# EAGLE board PCB (EAGLE 7.5.0)
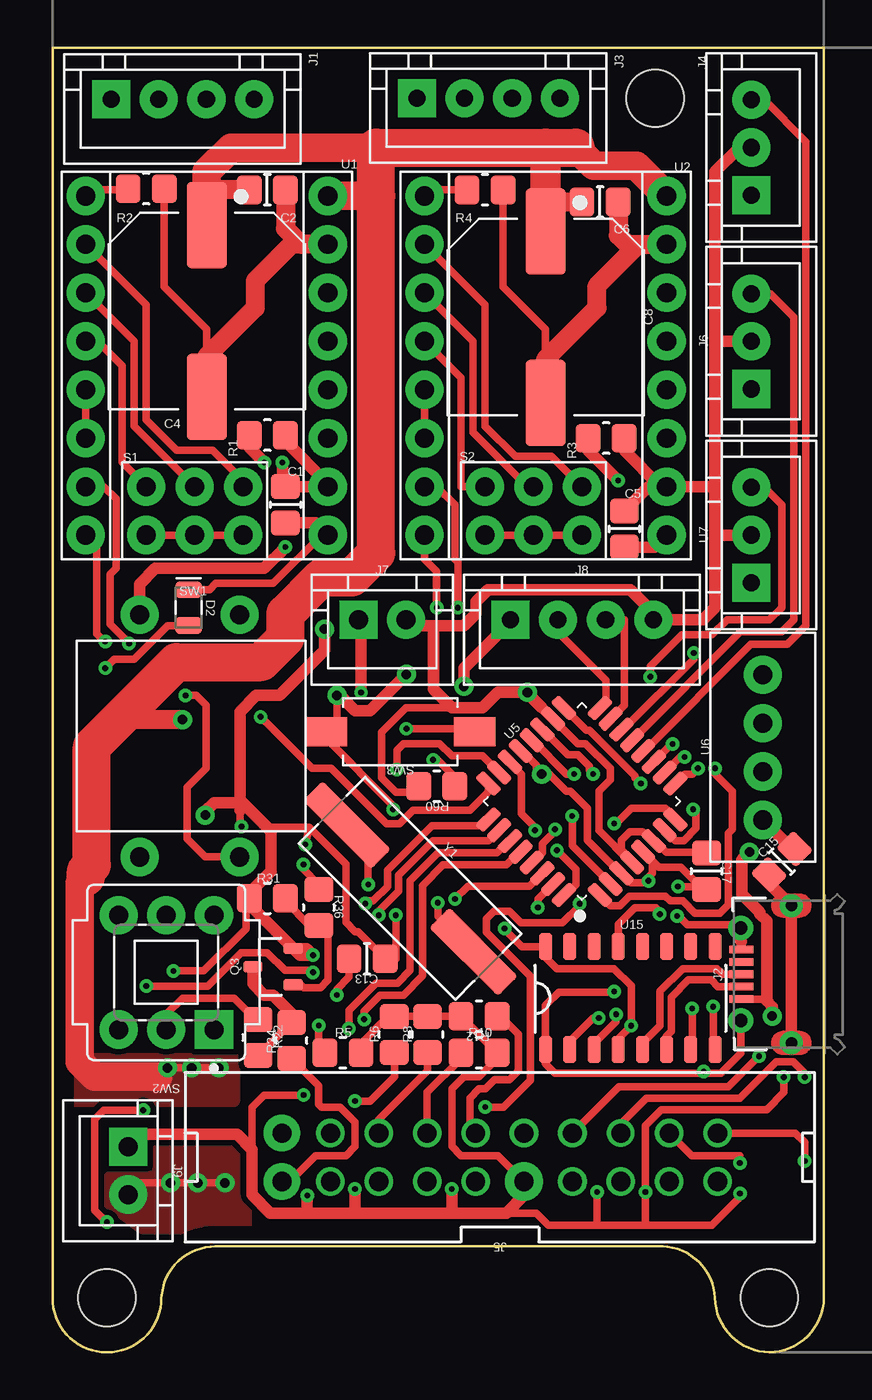
[diagram p0: board, top side]
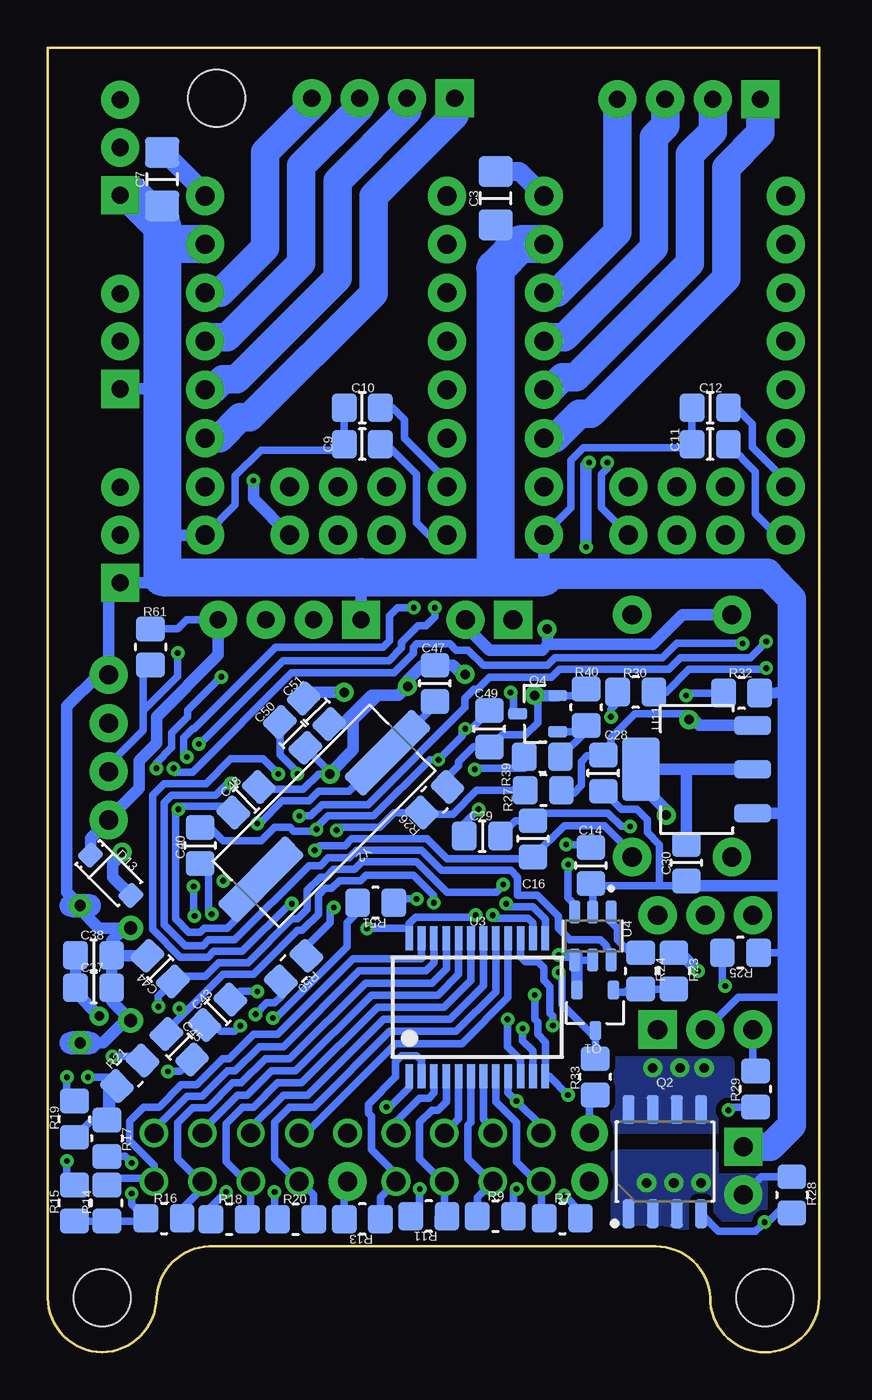
[diagram p1: board, bottom side, seen from below]

Size 40.48 x 68.42 mm. Coordinates in mm from the lower left corner, seen from the top.
Outline: 40.48,68.42 5.4,68.42 0,68.42 0,5.56 0,2.86 arc90 2.86,0 arc90 5.71,2.86 arc-87 8.57,5.56 31.75,5.56 arc-90 34.77,2.86 arc88 37.62,0 arc88 40.48,2.86 40.48,5.56 40.48,68.42
Copper layers (1*16): Top 0.035mm / dielectric 1.5mm / Bottom 0.035mm
Design rules "default *": minimum track width 10mil, minimum drill 0.61mm, track to track 8mil, track to pad 8mil, pad to pad 8mil, via to via 8mil, smd to smd 8mil, copper to edge 40mil, drill to drill 8mil, minimum pad ring 0mil, minimum via ring 8mil, stop-mask expansion 2mil, vias tented up to drill 20mil, thermal gap 10mil
Net classes: 0 Default: width 0.4 mm, clearance 0.3 mm
Holes 3 mm at 31.62,65.78 2.86,2.86 37.62,2.86

## Footprints (pad centres in the part's own frame; a part is rotated, then mirrored left to right if it is on the bottom)
Cap = smd 1.3 x 1.5: 1 -0.95,0; 2 0.95,0
Cap_C2 = smd 1.3 x 1.5: 1 -0.95,0; 2 0.95,0
CAP_1206 = smd 1.6 x 1.8: 1 -1.4,0; 2 1.4,0
CAPAE-10.3x10.3h13.5 = smd 4.5 x 2.1: 1 -4.5,0; 2 4.5,0
CAPAE-10.3x10.3h13.5_C8 = smd 4.5 x 2.1: 1 -4.5,0; 2 4.5,0
Cap_C9 = smd 1.3 x 1.5: 1 -0.95,0; 2 0.95,0
Cap_C10 = smd 1.3 x 1.5: 1 -0.95,0; 2 0.95,0
Cap_C13 = smd 1.3 x 1.5: 1 -0.95,0; 2 0.95,0
Cap_C16 = smd 1.3 x 1.5: 1 -0.95,0; 2 0.95,0
Cap_C28 = smd 1.3 x 1.5: 1 -0.95,0; 2 0.95,0
Cap_C29 = smd 1.3 x 1.5: 1 -0.95,0; 2 0.95,0
Cap_C50 = smd 1.3 x 1.5: 1 -0.95,0; 2 0.95,0
LED_0805(2012_Metric)_N_Red = smd 0.86 x 1.38: 1 -0.935,0; 2 0.935,0
Diode = smd 1 x 1.1: 1 -1.5,0; 2 1.5,0
B4B-XH-A = drill 0.9 pad 2 square: 1 -3.75,0 | drill 0.9 pad 2: 2 -1.25,0; 3 1.25,0; 4 3.75,0
JEEC_920-E52A2021S10100 = smd 0.4 x 1.25: 1 -1.3,2.225; 2 -0.65,2.225; 3 0,2.225; 4 0.65,2.225; 5 1.3,2.225 | drill 0.6 pad 1.2: 6@ -3.6,-0.4; 6@_2 3.6,-0.4 | drill 0.7 pad 1.3: 6@_1 -2.425,2.25; 6@_3 2.425,2.25
B3B-XH-A = drill 0.9 pad 2 square: 1 -2.5,0 | drill 0.9 pad 2: 2 0,0; 3 2.5,0
IDC20M = drill 1 pad 1.9: 1 11.43,1.27; 2 11.43,-1.27 | drill 1 pad 1.5: 3 8.89,1.27; 4 8.89,-1.27; 5 6.35,1.27; 6 6.35,-1.27; 7 3.81,1.27; 8 3.81,-1.27; 9 1.27,1.27; 10 1.27,-1.27; 12 -1.27,-1.27; 13 -3.81,1.27; 14 -3.81,-1.27; 15 -6.35,1.27; 17 -8.89,1.27; 18 -8.89,-1.27; 19 -11.43,1.27; 20 -11.43,-1.27 | drill 1 pad 2: 11 -1.27,1.27 | drill 1 pad 1.45: 16 -6.35,-1.27
B3B-XH-A_J6 = drill 0.9 pad 2 square: 1 -2.5,0 | drill 0.9 pad 2: 2 0,0; 3 2.5,0
B2B-XH-A = drill 1 pad 2 square: 1 -1.25,0 | drill 1 pad 2: 2 1.25,0
B4B-XH-A_J8 = drill 0.9 pad 2 square: 1 -3.75,0 | drill 0.9 pad 2: 2 -1.25,0; 3 1.25,0; 4 3.75,0
SOT23-3P95_230X110L30X43N = smd 0.61 x 1.01: 1 -0.95,-1.055; 2 0.95,-1.055; 3 0,1.055
SOIC8P127_488X585X363L48X40M = smd 0.64 x 1.52: 1 -1.905,-2.735; 2 -0.635,-2.735; 3 0.635,-2.735; 4 1.905,-2.735; 5 1.905,2.735; 6 0.635,2.735; 7 -0.635,2.735; 8 -1.905,2.735
SOT23-3P95_230X110L30X43N_Q3 = smd 0.61 x 1.01: 1 -0.95,-1.055; 2 0.95,-1.055; 3 0,1.055
SOT23-3P95_230X110L30X43N_Q4 = smd 0.61 x 1.01: 1 -0.95,-1.055; 2 0.95,-1.055; 3 0,1.055
Res = smd 1.3 x 1.5: 1 -0.95,0; 2 0.95,0
Res_R2 = smd 1.3 x 1.5: 1 -0.95,0; 2 0.95,0
Res_R5 = smd 1.3 x 1.5: 1 -0.95,0; 2 0.95,0
Res_R7 = smd 1.3 x 1.5: 1 -0.95,0; 2 0.95,0
Res_R26 = smd 1.3 x 1.5: 1 -0.95,0; 2 0.95,0
Res_R27 = smd 1.3 x 1.5: 1 -0.95,0; 2 0.95,0
Res_R30 = smd 1.3 x 1.5: 1 -0.95,0; 2 0.95,0
Res_R39 = smd 1.3 x 1.5: 1 -0.95,0; 2 0.95,0
Res_R61 = smd 1.3 x 1.5: 1 -0.95,0; 2 0.95,0
Untitled = drill 1 pad 2: 1 -1.27,2.54; 2 -1.27,0; 3 -1.27,-2.54; 4 1.27,2.54; 5 1.27,0; 6 1.27,-2.54
button = drill 1 pad 2: 1 -2.699,6.35; 2 -2.699,-6.35; 3 2.54,6.35; 4 2.54,-6.35
CK_PVA2-H1 = drill 1 pad 2 square: 1 -2.5,3 | drill 1 pad 2: 2 0,3; 3 2.5,3; 4 -2.5,-3; 5 0,-3; 6 2.5,-3
RES_btn = smd 2.2 x 1.5: 1 -3.9,0; 2 3.9,0
Untitled_U1 = drill 1 pad 2: 1 -6.35,8.89; 2 -6.35,6.35; 3 -6.35,3.81; 4 -6.35,1.27; 5 -6.35,-1.27; 6 -6.35,-3.81; 7 -6.35,-6.35; 8 -6.35,-8.89; 9 6.35,-8.89; 10 6.35,-6.35; 11 6.35,-3.81; 12 6.35,-1.27; 13 6.35,1.27; 14 6.35,3.81; 15 6.35,6.35; 16 6.35,8.89
SSOP24 = smd 0.4 x 1.25: 1 -3.575,-3.625; 2 -2.925,-3.625; 3 -2.275,-3.625; 4 -1.625,-3.625; 5 -0.975,-3.625; 6 -0.325,-3.625; 7 0.325,-3.625; 8 0.975,-3.625; 9 1.625,-3.625; 10 2.275,-3.625; 11 2.925,-3.625; 12 3.575,-3.625; 13 3.575,3.625; 14 2.925,3.625; 15 2.275,3.625; 16 1.625,3.625; 17 0.975,3.625; 18 0.325,3.625; 19 -0.325,3.625; 20 -0.975,3.625; 21 -1.625,3.625; 22 -2.275,3.625; 23 -2.925,3.625; 24 -3.575,3.625
SOT95P280X145-6N = smd 1.21 x 0.58: 1 -1.255,0.95; 2 -1.255,0; 3 -1.255,-0.95; 4 1.255,-0.95; 5 1.255,0; 6 1.255,0.95
QFP32P80_900X900X120L60X37L_AD2 = smd 0.55 x 1.4: 1 -2.8,-4.135; 2 -2,-4.135; 3 -1.2,-4.135; 4 -0.4,-4.135; 5 0.4,-4.135; 6 1.2,-4.135; 7 2,-4.135; 8 2.8,-4.135; 17 2.8,4.135; 18 2,4.135; 19 1.2,4.135; 20 0.4,4.135; 21 -0.4,4.135; 22 -1.2,4.135; 23 -2,4.135; 24 -2.8,4.135 | smd 1.4 x 0.55: 9 4.135,-2.8; 10 4.135,-2; 11 4.135,-1.2; 12 4.135,-0.4; 13 4.135,0.4; 14 4.135,1.2; 15 4.135,2; 16 4.135,2.8; 25 -4.135,2.8; 26 -4.135,2; 27 -4.135,1.2; 28 -4.135,0.4; 29 -4.135,-0.4; 30 -4.135,-1.2; 31 -4.135,-2; 32 -4.135,-2.8
DHT22 = drill 1 pad 2: 1 -3.81,0; 2 -1.27,0; 3 1.27,0; 4 3.81,0
SOT223-4P230_700X180L100X70N_AD1 = smd 0.99 x 1.97: 1 -2.3,-2.93; 2 0,-2.93; 3 2.3,-2.93 | smd 3.34 x 1.97: 4 0,2.93
SOIC16P127_1000X600X180L50X45N = smd 0.68 x 1.41: 1 -4.445,-2.7; 2 -3.175,-2.7; 3 -1.905,-2.7; 4 -0.635,-2.7; 5 0.635,-2.7; 6 1.905,-2.7; 7 3.175,-2.7; 8 4.445,-2.7; 9 4.445,2.7; 10 3.175,2.7; 11 1.905,2.7; 12 0.635,2.7; 13 -0.635,2.7; 14 -1.905,2.7; 15 -3.175,2.7; 16 -4.445,2.7
XTAL1140X490X430D1340L450X60N = smd 5.11 x 1.51: 1 -4.7,0; 2 4.7,0
XTAL1140X490X430D1340L450X60N_Y2 = smd 5.11 x 1.51: 1 -4.7,0; 2 4.7,0

## Placement (x,y rotation side)
C1  100nF  [Cap]  12.22,44.45 270 top
C2  100nF  [Cap_C2]  11.27,60.96 180 top
C3  10uF  [CAP_1206]  16.97,60.53 90 bottom
C4  1000uF  [CAPAE-10.3x10.3h13.5]  8.1,54.61 270 top
C5  100nF  [Cap]  30,43.18 270 top
C6  100nF  [Cap_C2]  28.73,60.33 180 top
C7  10uF  [CAP_1206]  34.47,61.53 90 bottom
C8  1000uF  [CAPAE-10.3x10.3h13.5_C8]  25.88,54.29 270 top
C9  10nF  [Cap_C9]  23.97,47.63 180 bottom
C10  10nF  [Cap_C10]  23.97,49.53 180 bottom
C11  10nF  [Cap_C9]  5.71,47.63 180 bottom
C12  10nF  [Cap_C10]  5.71,49.53 180 bottom
C13  100nF  [Cap_C13]  16.51,20.64 180 top
C14  100nF  [Cap_C9]  11.97,25.53 90 bottom
C15  100nF  [Cap_C13]  38.27,25.73 45 top
C16  10nF  [Cap_C16]  15.02,26.93 270 bottom
C17  100nF  [Cap_C13]  34.32,25.23 270 top
C28  10uF  [Cap_C28]  11.32,30.38 90 bottom
C29  10uF  [Cap_C29]  17.67,27.08 0 bottom
C30  10uF  [Cap_C10]  6.97,25.68 270 bottom
C37  100nF  [Cap_C29]  38.07,19.13 360 bottom
C38  1uF  [Cap_C29]  38.07,20.83 360 bottom
C40  100nF  [Cap_C29]  32.47,26.58 90 bottom
C43  100nF  [Cap_C29]  31.57,17.83 45 bottom
C44  22pF  [Cap_C29]  34.57,20.13 135 bottom
C45  22pF  [Cap_C29]  33.57,16.03 315 bottom
C47  22pF  [Cap_C9]  20.16,35.08 90 bottom
C48  22pF  [Cap_C29]  30.07,28.98 45 bottom
C49  10nF  [Cap_C9]  17.3,32.7 90 bottom
C50  100nF  [Cap_C50]  27.62,32.38 315 bottom
C51  100nF  [Cap_C50]  26.37,33.63 315 bottom
D2  Yellow  [LED_0805(2012_Metric)_N_Red]  7.14,39.05 270 top
D13  DIO  [Diode]  37.17,25.03 315 bottom
J1  STEP_MOT  [B4B-XH-A]  6.83,65.72 0 top
J2  USB  [JEEC_920-E52A2021S10100]  38.37,19.83 90 top
J3  STEP_MOT  [B4B-XH-A]  22.87,65.78 0 top
J4  ENDSTOP  [B3B-XH-A]  36.67,63.18 90 top
J5  SENSOR  [IDC20M]  23.47,10.23 180 top
J6  ENDSTOP  [B3B-XH-A_J6]  36.67,53.02 90 top
J7  LASER  [B2B-XH-A]  17.3,38.42 0 top
J8  ULTRASONIC  [B4B-XH-A_J8]  27.78,38.42 0 top
J9  POWER  [B2B-XH-A]  3.97,9.53 270 top
Q1  P MOSPFET  [SOT23-3P95_230X110L30X43N]  11.75,17.94 180 bottom
Q2  IRF4905LPBF  [SOIC8P127_488X585X363L48X40M]  8.1,10 0 bottom
Q3  P MOSPFET  [SOT23-3P95_230X110L30X43N_Q3]  11.57,20.23 90 top
Q4  N MOSPFET  [SOT23-3P95_230X110L30X43N_Q4]  14.76,33.5 90 bottom
R1  1K  [Res]  11.27,48.1 180 top
R2  10K  [Res_R2]  4.92,61.03 180 top
R3  1K  [Res]  29.05,47.94 180 top
R4  10K  [Res_R2]  22.7,60.96 180 top
R5  10K  [Res_R5]  15.24,15.72 0 top
R6  10K  [Res_R5]  17.94,16.67 90 top
R7  10K  [Res_R7]  13.47,7.03 0 bottom
R8  10K  [Res_R5]  19.68,16.67 90 top
R9  10K  [Res_R7]  16.99,7.14 0 bottom
R10  10K  [Res_R5]  22.38,15.72 0 top
R11  10K  [Res_R7]  20.48,7.14 180 bottom
R12  10K  [Res_R5]  22.38,17.62 180 top
R13  10K  [Res_R7]  23.97,6.99 180 bottom
R14  10K  [Res_R7]  37.37,7.83 90 bottom
R15  10K  [Res_R7]  39.07,7.83 90 bottom
R16  10K  [Res_R7]  34.37,7.03 0 bottom
R17  10K  [Res_R7]  37.37,11.23 270 bottom
R18  10K  [Res_R7]  30.96,6.99 360 bottom
R19  10K  [Res_R7]  39.07,12.23 90 bottom
R20  10K  [Res_R7]  27.46,6.99 0 bottom
R21  10K  [Res_R7]  36.17,14.63 45 bottom
R22  10K  [Res_R5]  10.79,16.51 270 top
R23  10K  [Res_R7]  7.62,20 270 bottom
R24  100R  [Res_R7]  9.37,20 270 bottom
R25  10K  [Res_R7]  4.13,20.96 180 bottom
R26  10K  [Res_R26]  20.17,28.98 225 bottom
R27  8K  [Res_R27]  14.47,29.48 180 bottom
R28  10K  [Res_R7]  1.43,8.26 270 bottom
R29  100R  [Res_R7]  3.33,13.81 90 bottom
R30  100R  [Res_R30]  9.62,34.63 180 bottom
R31  10K  [Res_R5]  11.27,23.81 0 top
R32  10K  [Res_R30]  4.07,34.58 180 bottom
R33  100R  [Res_R7]  11.75,14.45 90 bottom
R34  100R  [Res_R5]  12.54,16.35 90 top
R36  100R  [Res_R5]  13.97,23.33 270 top
R39  100R  [Res_R39]  14.52,31.23 0 bottom
R40  10K  [Res_R26]  12.22,33.83 90 bottom
R50  1K  [Res_R7]  27.57,20.13 225 bottom
R51  1K  [Res_R7]  23.27,23.58 180 bottom
R60  10K  [Res_R5]  20.16,29.69 180 top
R61  47K  [Res_R61]  35.08,36.99 270 bottom
S1  3XSWITCH  [Untitled]  7.46,44.13 90 top
S2  3XSWITCH  [Untitled]  25.24,44.13 90 top
SW1  ON BUTTN  [button]  7.27,32.33 0 top
SW2  POWER SWITCH  [CK_PVA2-H1]  5.97,19.93 180 top
SW3  RES BTN  [RES_btn]  18.26,32.54 180 top
U1  DRIVER  [Untitled_U1]  8.1,51.75 0 top
U2  DRIVER  [Untitled_U1]  25.88,51.75 0 top
U3  1:16 MLTIPLECSOR  [SSOP24]  17.94,18.1 0 bottom
U4  1:2 MULTIPLECSOR  [SOT95P280X145-6N]  11.87,21.83 270 bottom
U5  ATMEGA328P  [QFP32P80_900X900X120L60X37L_AD2]  27.78,28.89 45 top
U6  DHT  [DHT22]  37.27,31.73 90 top
U7  SERVO  [B3B-XH-A_J6]  36.67,42.86 90 top
U11  AMS1117-3.3  [SOT223-4P230_700X180L100X70N_AD1]  6.42,30.58 90 bottom
U15  CH340G  [SOIC16P127_1000X600X180L50X45N]  30.32,18.57 0 top
Y1  12MHz  [XTAL1140X490X430D1340L450X60N]  18.77,24.33 315 top
Y2  16MHz  [XTAL1140X490X430D1340L450X60N_Y2]  25.97,28.13 225 bottom

## Library data of the parts
C1-C3 C5-C7 C9-C17 C28-C30 C37 C38 C40 C43-C45 C47-C51 = common; DESCRIPTION: Capacitor
C4 C8 = common; DESCRIPTION_1: Capacitor; DESCRIPTION_2: Polarized
D2 = common; MANUFACTURER: https://www.chipdip.ru/product/kp-2012ec; UNIQUE_NAME: LED100
D13 = common; DESCRIPTION: Diode
J1-J9 Q1 Q3 Q4 S1 S2 U1-U7 U15 = common
Q2 = common; MANUFACTURER: https://www.chipdip.ru/product/irf9310trpbf-infineon; PART_NUMBER_(DIGI-KEY): IRF4905LPBF-ND; PART_NUMBER_(LCSC): C537768; UNIQUE_NAME: IR_TO-220AB
R1-R34 R36 R39 R40 R50 R51 R60 R61 = common; DESCRIPTION: Resistor
SW1 SW3 = common; DESCRIPTION: Make Contact; MANUFACTURER: https://www.chipdip.ru/product0/8007094223
SW2 = common; DESCRIPTION: Toggle Switch SPDT Through Hole; MANUFACTURER: https://www.chipdip.ru/product0/8003917651
U11 = common; DATASHEET: http://datasheets.diptrace.com/jsmsemi/AMS1117-3.3.pdf; MANUFACTURER: JSMSEMI; PART_NUMBER_(LCSC): C917183; UNIQUE_NAME: JSMSEMI_SOT-223-3L
Y1 Y2 = common; DATASHEET: http://datasheets.diptrace.com/crystals/hc49-4hsmx.pdf; MANUFACTURER: IQD; UNIQUE_NAME: IQD_HC49_4H

## Nets
Gnd: C1.2 C2.1 C3.1 C4.2 C5.2 C6.1 C7.1 C8.2 C9.2 C10.2 C11.2 C12.2 C13.2 C14.1 C15.1 C17.2 C28.1 C29.1 C30.2 C37.2 C38.2 C43.2 C44.2 C45.2 C47.2 C48.2 C49.1 C50.2 C51.2 D2.1 J2.5 J2.6@ J2.6@_1 J2.6@_2 J2.6@_3 J4.1 J5.11 J6.1 J8.1 J9.1 Q4.2 R2.1 R4.1 R5.2 R6.2 R7.2 R8.2 R9.2 R10.2 R11.2 R12.2 R13.2 R14.1 R15.1 R16.1 R17.1 R18.1 R19.1 R20.1 R21.1 R22.1 R25.1 R26.1 R32.1 R40.2 SW2.2 SW3.2 U1.9 U1.15 U2.9 U2.15 U3.12 U4.2 U5.3 U5.5 U5.21 U6.4 U7.1 U11.1 U15.1
Net_0: Q4.1 R39.2 R40.1
Net_1: R24.1 U4.1
Net_2: C2.2 C3.2 C4.1 C6.2 C7.2 C8.1 C28.2 Q2.5 Q2.6 Q2.7 Q2.8 R27.1 U1.16 U2.16 U11.3
Net_3: U1.5 U1.6
Net_4: U2.5 U2.6
Net_5: J3.4 U2.14
Net_6: J3.3 U2.13
Net_7: J3.2 U2.12
Net_8: J3.1 U2.11
Net_9: J5.10 R12.1 U3.3
Net_10: J5.2 R33.1
Net_11: Q3.3 R22.2 R34.2
Net_12: R3.2 S2.1 S2.2 S2.3
Net_13: R4.2 U2.1
Net_14: Q3.1 R31.2 R36.2
Net_15: R36.1 U4.3
Net_16: J8.2 U5.16
Net_17: Q1.1 R23.2 R24.2
Net_18: R26.2 R27.2 U5.22
Net_19: J1.4 U1.14
Net_20: J1.3 U1.13
Net_21: J1.2 U1.12
Net_22: J1.1 U1.11
Net_23: S1.6 U1.2
Net_24: S1.5 U1.3
Net_25: S1.4 U1.4
Net_26: R1.2 S1.1 S1.2 S1.3
Net_27: R2.2 U1.1
Net_28: C12.1 U1.7 U5.9
Net_29: C11.1 U1.8 U5.2
Net_30: C10.1 U2.7 U5.10
Net_31: J9.2 Q2.1 Q2.2 Q2.3 R28.1
Net_32: R29.2 SW2.3
Net_33: Q2.4 R28.2 R29.1
Net_36: S2.4 U2.4
Net_37: S2.5 U2.3
Net_38: S2.6 U2.2
Net_41: C9.1 U2.8 U5.11
Net_42: J4.3 U5.12
Net_43: J6.3 U5.13
Net_44: U3.1 U5.19
Net_45: U3.10 U5.28
Net_46: U3.11 U5.27
Net_47: U3.14 U5.26
Net_48: U3.13 U5.25
Net_49: R5.1 U3.15
Net_50: J5.1 R34.1
Net_51: J5.9 R13.1 U3.2
Net_52: Q1.3 R25.2 R33.2
Net_53: J5.7 R11.1 U3.4
Net_54: J5.8 R10.1 U3.5
Net_55: J5.5 R9.1 U3.6
Net_56: J5.6 R8.1 U3.7
Net_57: J5.3 R7.1 U3.8
Net_58: J5.4 R6.1 U3.9
Net_59: J5.19 R14.2 U3.23
Net_60: J5.20 R15.2 U3.22
Net_61: J5.17 R16.2 U3.21
Net_62: J5.18 R17.2 U3.20
Net_63: J5.15 R18.2 U3.19
Net_64: J5.16 R19.2 U3.18
Net_65: J5.13 R20.2 U3.17
Net_66: J5.14 R21.2 U3.16
Net_67: U4.6 U5.17
Net_68: J7.1 Q4.3
Net_69: R50.1 U5.31
Net_70: R39.1 U5.23
Net_72: R51.2 U15.2
Net_73: R50.2 U15.3
Net_74: C40.1 U15.13
Net_75: J8.3 U5.15
Net_76: J2.3 U15.5
Net_77: J2.2 U15.6
Net_78: C37.1 C38.1 D13.2 J2.1
Net_82: R30.2 U5.24
Net_83: D2.2 R30.1
Net_85: C16.2 R32.2 SW1.4 U5.32
Net_86: U5.1 U7.3
Net_87: C40.2 C49.2 R60.1 SW3.1 U5.29
Net_97: C48.1 U5.7 Y2.2
Net_100: C50.1 U5.20
Net_105: R51.1 U5.30
Net_110: C44.1 U15.8 Y1.1
Net_111: C45.1 U15.7 Y1.2
Net_125: R61.2 U5.14 U6.2
Net_155: C47.1 U5.8 Y2.1
USBVCC: C1.1 C5.1 C13.1 C14.2 C15.2 C16.1 C17.1 C29.2 C30.1 C43.1 C51.1 D13.1 J4.2 J6.2 J7.2 J8.4 Q1.2 Q3.2 R1.1 R3.1 R23.1 R31.1 R60.2 R61.1 SW1.1 U1.10 U2.10 U3.24 U4.4 U4.5 U5.4 U5.6 U5.18 U6.1 U7.2 U11.2 U11.4 U15.4 U15.16

## Tracks (layer width: path | path; a pad name or v marks a point on that pad's centre or on a via)
Gnd  (via drill 0.3 pad 0.7, 0.5 pad 1)
  Top 0.4: R2.1 5.87,55.88 8.1,53.66 C4.2 | R4.1 23.65,55.88 25.88,53.66 C8.2 | U5.21 | SW2.2 5.97,17.72 6.83,18.57 9.53,18.57 10.64,17.46 R22.1 | v36.07,8.33 36.17,8.23 34.61,6.67 31.11,6.67 | 31.11,6.67 28.58,6.67 | 28.58,6.67 26.04,6.67 25.4,7.3 23.81,7.3 | 31.11,6.67 v31.11,8.41 31.11,11.88 31.96,12.73 37.47,12.73 38.37,13.63 v38.37,14.43 | v28.58,8.41 28.58,6.67 | J5.11 23.38,10.32 21.43,10.32 20.96,10.8 20.96,13.81 21.59,14.45 22.38,14.45 23.33,15.4 R10.2 R12.2 R8.2 | R5.2 16.19,16.19 17.62,17.62 R6.2 R8.2 | v14.92,18.73 14.92,19.05 15.56,19.69 C13.2 | D2.1 8.24,39.99 8.57,40.32 11.59,40.32 14.13,42.86 U1.9 | v14.92,34.45 14.92,33.11 SW3.2 14.36,32.19 17.87,28.68 v17.87,28.48 | U5.21 24.66,31.53 25.4,30.8 25.4,30.6 v25.67,30.33 26.07,30.33 26.97,29.43 27.17,29.43 28.07,28.53 28.07,26.86 29.81,25.12 U5.3 30.35,24.63 30.97,24.63 31.27,24.93 | v29.47,18.93 29.44,18.89 26.57,18.89 25.88,18.2 U15.1 25.88,15.12 26.37,14.63 34.17,14.63 | R8.2 | 31.27,24.93 31.47,25.13 31.47,25.77 U5.5 | U5.5 | U5.5 31.81,25.43 32.97,25.43 34.12,24.28 C17.2 34.17,24.43 v32.82,24.43 | 34.17,14.63 35.07,14.63 36.12,15.68 J2.6@_1 | v34.17,14.73 34.17,14.63 | 36.15,21.53 J2.5 | v31.27,24.73 31.27,24.93 | v32.77,22.88 32.87,22.88 33.32,22.43 35.95,22.43 J2.6@_3 | 10.48,10.64 10.48,12.86 11.11,13.49 v13.18,13.49 | J9.1
  Top 0.55: U5.21
  Top 0.6: C5.2 31.59,42.23 U2.9 | C1.2 13.81,43.5 U1.9 | J8.1 24.03,38.32 21.59,35.88 v21.59,34.92 | J5.11 24.74,8.23 23.81,7.3 20.96,7.3 | 20.96,7.3 v20.96,8.57 | 20.96,7.3 15.87,7.3 | 15.87,7.3 v15.87,8.57 | 15.87,7.3 13.37,7.3 | 13.37,7.3 v13.37,8.23 | J9.1 | 13.37,7.3 11.43,7.3 10.48,8.26 10.48,10.64 9.68,11.43 3.97,11.43 J9.1 | v14.92,34.45 15.08,34.45 15.87,33.66 16.67,33.66 v18.57,35.56 | J2.6@_3 36.12,21.56 36.15,21.53 | J2.6@_2 | J2.6@_2 J2.6@ | J2.6@ | C15.1 37.6,24.6 J2.6@_2
  Top 1: U1.15 13.05,58.1 | 13.05,58.1 12.54,58.1 10.64,56.2 10.64,54.77 8.1,52.23 C4.2 | C8.2 25.88,52.07 28.58,54.77 28.58,55.93 30.75,58.1 U2.15 30.16,58.1 29.68,58.58 C6.1 | C2.1 12.22,58.94 13.05,58.1
  Bottom 0.4: C10.2 C9.2 24.92,47.31 29.29,47.31 30.64,45.96 30.64,44.45 U2.9 | C12.2 C11.2 6.66,47.43 12.37,47.43 13.02,46.78 13.02,44.29 U1.9 | C48.2 29.28,29.53 27.07,29.53 26.27,30.33 v25.67,30.33 25.72,30.33 25.72,30.48 C50.2 | SW2.2 5.93,16.93 4.25,18.61 1.43,18.61 | R25.1 1.43,20.96 | 1.43,24.48 11.87,24.48 U4.2 11.87,24.25 11.97,24.35 C14.1 | v13.18,13.49 14.15,14.47 U3.12 14.36,16.27 14.76,16.67 14.76,17.3 14.92,17.46 v14.92,18.73 | R7.2 12.52,7.38 v13.37,8.23 | R9.2 16.04,8.41 v15.87,8.57 | v20.96,8.57 20.96,7.62 R11.2 | R13.2 24.92,8.78 J5.11 | v28.58,8.41 28.58,7.15 R20.1 | R18.1 31.91,7.62 v31.11,8.41 | R15.1 R14.1 | R14.1 | v36.07,8.33 36.07,7.78 R16.1 35.47,6.88 R14.1 | R17.1 38.17,12.18 R19.1 | v38.37,14.43 37.12,14.43 37.12,12.43 R17.1 | R17.1 37.37,14.22 37.14,14.45 | R21.1 37.31,13.96 37.31,12.24 R17.1 | R40.2 12.37,34.78 12.7,34.45 Q4.2 14.76,34.45 | 14.76,34.45 14.76,33.02 15.4,32.39 16.61,32.39 17.25,31.75 C49.1 18.15,31.75 18.92,30.98 18.92,30.77 19.5,30.2 R26.1 | v14.92,34.45 14.76,34.45 | v29.47,18.93 30.37,18.93 30.8,18.5 C43.2 | v34.17,14.73 33.53,14.73 C45.2 | v32.82,24.43 32.82,22.93 v32.77,22.88 | C28.1 | C28.1 10.37,28.48 9.57,28.48 9.02,27.93 9.02,27.28 8.37,26.63 8.37,24.48 6.97,24.48 C30.2 | C29.1 18.62,27.73 v17.87,28.48
  Bottom 0.6: 34.45,40.66 34.75,40.36 U7.1 37.27,39.76 U6.4 37.8,35.54 39.47,33.87 39.47,24.13 J2.6@_2 38.77,23.23 37.8,22.25 J2.6@_3 36.45,22.25 37.12,21.58 C38.2 | J6.1 34.68,50.52 34.45,50.3 | U2.9 34.24,42.86 34.45,43.07 | J8.1 24.03,40.66 | v21.59,34.92 | v21.59,34.92 22.07,34.45 | 22.07,34.45 23.17,34.45 24.45,33.18 24.45,31.59 25.67,30.37 v25.67,30.33 | v21.59,34.92 21.59,35.24 20.8,36.03 C47.2 19.21,36.03 18.73,35.56 v18.57,35.56 | R32.1 1.43,34.63 | v21.59,34.92 22.07,34.45 | 22.07,34.45 23.5,34.45 24.99,32.96 C51.2 | U1.9 14.45,40.83 | Q4.2 v14.92,34.45 | J2.6@ 37.57,16.23 36.4,17.4 J2.6@_1 37.12,18.4 C37.2 C38.2 | C44.2 37.09,20.8 C38.2 | U11.1 1.43,28.28 | C30.2 6.97,24.48 1.43,24.48
  Bottom 1: C7.1 34.47,58.1 U2.15 | C3.1 15.95,58.1 U1.15
  Bottom 1.5: 36.08,60.68 J4.1 | 33.97,58.1 34.45,57.62 | 2.73,40.83 1.43,39.53 1.43,34.63 1.43,28.28 1.43,24.48 1.43,20.96 1.43,18.61 1.43,11.91 2.56,10.78 J9.1
  Bottom 1.6: 14.45,40.66 14.45,40.83 2.73,40.83
  Bottom 2: 36.08,60.68 34.45,59.06 34.45,57.62 34.45,50.3 34.45,43.07 34.45,40.66 24.03,40.66 16.99,40.66 | U2.15 33.97,58.1 | 16.99,40.66 14.45,40.66 | U1.15 15.72,58.1 16.99,56.83 16.99,40.66
Net_0
  Bottom 0.4: R39.2 12.22,32.58 R40.1 12.55,32.55 Q4.1
Net_1
  Bottom 0.4: R24.1 9.9,20.95 10.57,21.63 10.57,22.23 10.92,22.58 U4.1
Net_2  (via drill 0.5 pad 1)
  Top 0.4: v6.03,14.92 v7.3,14.92 v8.73,14.92
  Top 1: C6.2 25.88,60.33 C8.1 | C2.2 8.1,60.96 C4.1 | v6.03,14.92 5.56,14.45 | v6.82,33.18 3.48,33.18
  Top 1.5: U1.16 16.99,60.64 | 16.99,63.18 9.37,63.18 8.1,61.91 C4.1 | 5.56,14.45 2.22,14.45 1.43,15.24 1.43,24.61 1.75,24.92 | 27.46,63.18 28.42,62.23 30.64,62.23 U2.16
  Top 1.6: 25.88,62.87 C8.1
  Top 2: 25.88,63.18 16.99,63.18 16.99,60.64 16.99,41.91 15.72,40.64 14.13,40.64 12.22,38.74 12.22,37.47 10.95,36.2 6.5,36.2 3.48,33.18 2.06,31.76 2.06,25.56 1.75,25.24 1.75,24.92 | 25.88,63.18 25.88,62.87 | 25.88,63.18 27.46,63.18
  Bottom 0.4: v6.82,33.18 6.82,33.48 9.67,33.48 10.92,32.23 10.92,31.73 11.37,31.28 12.17,31.28 | 12.17,31.28 12.47,30.98 12.47,29.73 12.87,29.33 13.47,29.33 13.47,29.48 R27.1 | C28.2 11.77,31.33 12.17,31.28
  Bottom 0.6: U11.3 6.27,32.88 6.57,33.18 v6.82,33.18
  Bottom 1: C7.2 34.37,62.93 32.23,60.78 U2.16 | C3.2 15.73,61.93 U1.16
  pour Top (isolate 0.3, no thermals): 1.11,15.4 9.52,15.4 9.52,13.18 1.11,13.18
  pour Bottom (isolate 0.3, no thermals): 5.4,11.75 10.64,11.75 10.64,15.24 4.76,15.24 4.76,11.75
Net_3
  Top 0.4: U1.5 U1.6
Net_4
  Top 0.4: U2.5 U2.6
Net_5
  Bottom 1.5: J3.4 26.62,65.38 29.07,62.93 29.07,57.93 31.44,55.56 U2.14
Net_6
  Bottom 1.5: J3.3 24.12,65.28 27.17,62.23 27.17,57.13 31.07,53.23 32.23,53.23 U2.13
Net_7
  Bottom 1.5: J3.2 21.62,65.08 25.27,61.43 25.27,56.33 30.57,51.03 31.27,51.03 31.82,50.48 U2.12
Net_8
  Bottom 1.5: J3.1 19.12,64.88 23.37,60.63 23.37,55.53 29.87,49.03 30.37,49.03 31.46,47.94 U2.11
Net_9
  Top 0.4: J5.10 21.91,11.5 21.91,13.34 22.38,13.81 22.73,13.81 23.21,14.29 23.97,14.29 24.45,14.76 24.45,16.67 23.5,17.62 R12.1
  Bottom 0.4: U3.3 20.21,13.6 20.48,13.34 20.96,13.34 22.2,12.09 J5.10
Net_10
  Bottom 0.4: R33.1 11.75,13.18 12.04,12.88 J5.2
Net_11
  Top 0.4: R22.2 R34.2
  Top 0.6: Q3.3 10.52,19.33 11.11,18.73 11.57,18.73 12.54,17.76 R34.2
Net_12  (via drill 0.3 pad 0.7)
  Top 0.4: S2.1 S2.2 | S2.2 | S2.3 S2.2 | S2.2
  Top 0.6: v29.69,45.72 28.1,47.31 R3.2
  Bottom 0.6: S2.3 29.69,44.77 v29.69,45.72
Net_13
  Top 0.4: R4.2 19.53,60.96 U2.1
Net_14
  Top 0.4: Q3.1 13.02,19.28 13.17,19.13 14.07,19.13 14.47,19.53 14.47,21.88 R36.2 13.5,22.38 12.22,23.66 R31.2
Net_15  (via drill 0.3 pad 0.7)
  Top 0.4: R36.1 13.97,24.53 13.17,25.33 v13.17,25.58
  Bottom 0.4: v13.17,25.58 13.17,23.83 12.82,23.48 U4.3
Net_16
  Top 0.4: J8.2 26.53,37.76 29.05,35.24 29.05,34.12 U5.16
Net_17
  Bottom 0.4: R23.2 10.01,19.05 10.17,18.89 10.8,18.89 Q1.1 | R24.2 R23.2 | R23.2
Net_18  (via drill 0.3 pad 0.7)
  Top 0.4: v25.32,27.38 25.32,27.54 24.61,28.26 24.61,30.32 24.01,30.92 U5.22
  Bottom 0.4: R27.2 17.97,29.48 19.22,28.23 20.77,28.23 R26.2 22.29,28.31 23.07,27.53 25.17,27.53 v25.32,27.38
Net_19
  Bottom 1.5: J1.4 10.58,58.74 13.75,55.56 U1.14
Net_20
  Bottom 1.5: J1.3 8.08,64.32 8.67,63.73 8.67,57.93 13.37,53.23 14.45,53.23 U1.13
Net_21
  Bottom 1.5: J1.2 5.58,64.02 6.77,62.83 6.77,57.13 12.77,51.13 13.47,51.13 14.12,50.48 U1.12
Net_22
  Bottom 1.5: J1.1 3.08,63.92 4.87,62.13 4.87,56.33 11.97,49.23 12.57,49.23 13.86,47.94 U1.11
Net_23
  Top 0.4: S1.6 10,45.72 8.41,47.31 6.51,47.31 4.92,48.9 4.92,54.93 U1.2
Net_24
  Top 0.4: U1.3 4.29,53.02 4.29,48.58 S1.5
Net_25
  Top 0.4: S1.4 3.65,46.67 3.65,51.75 2.38,53.02 U1.4
Net_26  (via drill 0.3 pad 0.7)
  Top 0.4: S1.3 S1.2 | S1.2 | S1.1 S1.2 | S1.2
  Top 0.6: R1.2 10.32,47.46 v11.11,46.67 | v11.11,46.67
  Bottom 0.4: v11.11,46.67 11.11,46.35 11.43,46.04 11.43,44.29 S1.3
Net_27
  Top 0.4: U1.1 2.06,60.96 3.9,60.96 R2.2
Net_28  (via drill 0.3 pad 0.7)
  Top 0.4: U1.7 2.7,45.4 3.33,44.77 3.33,41.12 3.02,40.8 3.02,38.18 v4.02,37.18 | v33.87,30.63 33.57,30.33 33.18,30.33 U5.9
  Bottom 0.4: v4.02,37.18 7.47,37.18 8.22,36.43 13.87,36.43 14.26,36.04 17.62,36.04 18.42,36.83 19.05,36.83 19.37,37.15 21.11,37.15 21.27,36.99 21.27,36.67 22.32,35.63 27.67,35.63 32.87,30.43 33.87,30.43 v33.87,30.63 | U1.7 1.75,45.72 3.49,47.47 3.49,48.68 4.34,49.53 C12.1
Net_29  (via drill 0.3 pad 0.7)
  Top 0.4: U1.8 2.32,42.86 2.32,37.68 2.72,37.28 v2.77,37.28 | v27.27,28.13 27.27,26.57 U5.2
  Bottom 0.4: v2.77,37.28 3.62,36.43 7.27,36.43 7.87,35.83 13.62,35.83 14.05,35.4 17.3,35.4 17.94,34.77 18.1,34.77 18.57,34.29 18.57,33.83 23.67,28.73 26.07,28.73 26.67,28.13 27.07,28.13 | 27.07,28.13 | 27.07,28.13 v27.27,28.13 | U1.8 2.22,42.86 3.33,43.97 3.33,46.19 C11.1
Net_30  (via drill 0.3 pad 0.7)
  Top 0.4: U2.7 20.16,45.4 21.11,44.45 21.11,41.59 21.27,41.43 v21.27,39.05 | U5.10 32.94,31.23 v33.17,31.23
  Bottom 0.4: v21.27,39.05 22.12,39.05 22.54,38.63 22.54,37.31 22.87,36.98 28.52,36.98 32.8,32.7 32.86,32.7 33.34,32.23 33.34,31.39 v33.17,31.23 | U2.7 19.53,45.72 21.75,47.94 21.75,48.9 22.38,49.53 C10.1
Net_31  (via drill 0.5 pad 1)
  Top 0.4: J9.2 4.58,8.89 v6.19,8.89 v7.62,8.89 v9.05,8.89
  Bottom 0.4: J9.2 3.95,8.28 3.02,9.21 R28.1
  pour Top (isolate 0.3, no thermals): 3.02,7.78 4.71,6.51 10.16,6.51 10.16,9.89 9.53,10.64 5.56,10.64 5.56,9.21 3.02,9.21
  pour Bottom (isolate 0.3, no thermals): 3.02,7.62 3.02,9.05 5.56,9.05 5.56,10.32 9.84,10.32 10.64,10.32 10.64,6.51 3.02,6.51
Net_32
  Bottom 0.4: SW2.3 3.47,14.9 R29.2
Net_33  (via drill 0.3 pad 0.7)
  Top 0.4: v2.86,6.83 2.22,7.46 2.22,12.22 2.7,12.7 v4.76,12.7
  Bottom 0.4: R28.2 1.43,7.62 1.91,7.62 2.86,6.67 | 2.86,6.67 3.02,6.67 3.33,6.35 5.27,6.35 Q2.4 | R29.1 4.6,12.86 v4.76,12.7 | v2.86,6.83 2.86,6.67
Net_36
  Top 0.4: S2.4 21.43,45.4 21.43,51.12 U2.4
Net_37
  Top 0.4: U2.3 22.07,53.02 22.07,48.26 24.92,45.4 S2.5
Net_38
  Top 0.4: S2.6 26.19,46.99 24.29,46.99 22.7,48.58 22.7,54.93 U2.2
Net_41  (via drill 0.3 pad 0.7)
  Top 0.4: U2.8 19.53,41.59 20.16,40.96 v20.16,39.05 | v32.54,31.91 32.49,31.91 U5.11
  Bottom 0.4: v20.16,39.05 20.16,38.58 20.64,38.1 21.06,38.1 21.91,37.25 21.91,36.94 22.57,36.28 28.12,36.28 32.49,31.91 v32.54,31.91 | U2.8 20.48,42.86 21.11,43.5 21.11,46.04 22.7,47.63 C9.1
Net_42
  Top 0.4: J4.3 37.35,65.68 39.53,63.5 39.53,38.1 38.56,37.13 36.65,37.13 31.06,31.53 U5.12
Net_43
  Top 0.4: J6.3 37.66,55.52 38.89,54.29 38.89,38.42 38.26,37.78 36.1,37.78 U5.13
Net_44  (via drill 0.3 pad 0.7)
  Top 0.4: v22.7,12.86 23.65,12.86 25.07,14.28 25.07,19.73 22.77,22.03 22.77,22.73 23.17,23.13 23.97,23.13 24.57,22.53 26.77,22.53 27.67,23.43 v27.67,23.53 | v28.37,30.33 28.17,30.53 28.17,30.73 27.57,31.33 27.04,31.33 U5.19
  Bottom 0.4: U3.1 21.51,13.89 22.54,12.86 v22.7,12.86 | v28.37,30.33 29.17,31.13 30.87,31.13 32.17,29.83 34.37,29.83 34.97,29.23 34.97,22.18 33.52,20.73 32.07,20.73 31.77,21.03 30.27,21.03 27.77,23.53 v27.67,23.53
Net_45  (via drill 0.3 pad 0.7)
  Top 0.4: v16.35,17.46 16.35,17.88 17.2,18.73 18.42,18.73 19.42,19.74 19.42,24.48 20.5,25.56 23.81,25.56 24.51,26.25 U5.28
  Bottom 0.4: U3.10 15.66,15.35 16.35,16.03 v16.35,17.46
Net_46  (via drill 0.3 pad 0.7)
  Top 0.4: v15.56,16.99 15.56,17.94 16.99,19.37 18.1,19.37 18.77,20.04 18.77,24.73 20.24,26.19 23.34,26.19 23.96,26.82 U5.27
  Bottom 0.4: U3.11 15.01,15.81 15.56,16.35 v15.56,16.99
Net_47  (via drill 0.3 pad 0.7)
  Top 0.4: v17.12,22.93 17.12,23.13 18.17,24.18 18.17,25.03 19.97,26.83 22.89,26.83 U5.26
  Bottom 0.4: v17.12,22.93 17.12,22.78 15.27,22.78 15.01,22.52 U3.14
Net_48  (via drill 0.3 pad 0.7)
  Top 0.4: v16.42,23.53 16.42,23.68 16.82,23.68 17.57,24.43 17.57,25.28 19.92,27.62 22.38,27.62 22.71,27.95 U5.25
  Bottom 0.4: v16.42,23.53 16.42,23.38 15.02,23.38 14.36,22.72 U3.13
Net_49  (via drill 0.3 pad 0.7)
  Top 0.4: v13.97,17.15 13.97,16.04 R5.1
  Bottom 0.4: v13.97,17.15 13.97,17.62 14.13,17.78 14.13,19.19 14.45,19.5 14.45,20.16 14.76,20.48 15.4,20.48 15.66,20.74 U3.15
Net_50
  Top 0.4: R34.1 13.97,13.97 13.97,13.02 14.13,12.86 15.08,12.86 15.87,12.07 15.87,10.8 15.4,10.32 13.81,10.32 12.45,8.96 J5.1
Net_51
  Bottom 0.4: R13.1 23.02,8.14 J5.9 22.2,9.34 23.5,10.64 23.5,12.38 23.65,12.54 23.65,13.02 22.23,14.45 22.23,15.24 21.91,15.56 21.11,15.56 20.86,15.31 U3.2
Net_52  (via drill 0.3 pad 0.7)
  Top 0.4: v13.67,19.93 13.67,20.03 12.2,20.03 11.27,20.96 9.9,20.96 8.15,19.21 v4.92,19.21
  Bottom 0.4: Q1.3 R33.2 11.75,16.51 13.49,18.26 13.49,19.93 v13.67,19.93 | Q1.3 | v4.92,19.21 5.08,19.21 R25.2
Net_53
  Bottom 0.4: U3.4 19.56,13.14 20,12.7 20.32,12.7 20.96,12.07 20.96,10.16 19.75,8.96 J5.7 19.66,7.28 R11.1
Net_54
  Top 0.4: R10.1 21.43,15.4 19.66,13.63 J5.8
  Bottom 0.4: J5.8 18.91,12.25 U3.5
Net_55
  Bottom 0.4: U3.6 18.26,12.06 18.42,11.91 18.42,10.16 17.21,8.96 J5.5 17.94,8.14 R9.1
Net_56
  Top 0.4: R8.1 19.69,14.76 17.12,12.2 J5.6
  Bottom 0.4: J5.6 17.12,11.72 17.61,12.22 U3.7
Net_57
  Bottom 0.4: U3.8 16.96,13.15 15.87,12.07 15.87,10 14.83,8.96 J5.3 14.58,7.44 14.42,7.28 R7.1
Net_58  (via drill 0.3 pad 0.7)
  Top 0.4: v15.87,13.18 16.67,13.18 17.94,14.45 R6.1
  Bottom 0.4: J5.4 14.58,11.88 v15.87,13.18 | v15.87,13.18 16.31,13.62 U3.9 | v15.87,13.18
Net_59
  Bottom 0.4: U3.23 20.86,20.64 24.45,20.64 28.42,16.67 29.69,16.67 30.96,15.4 31.3,15.4 32.67,14.03 33.47,14.03 34.64,12.86 35.44,12.86 36.17,12.13 36.17,11.09 34.9,9.82 J5.19 34.9,9.13 37.37,9.13 R14.2
Net_60  (via drill 0.3 pad 0.7)
  Top 0.4: v39.47,10.03 39.47,11.01 38.98,11.5 J5.20
  Bottom 0.4: J5.20 34.9,11.7 33.17,13.43 32.37,13.43 31.04,14.76 30.64,14.76 29.37,16.03 28.1,16.03 24.13,20 20.64,20 20.21,20.43 U3.22 | v39.47,10.03 39.47,9.18 R15.2
Net_61
  Bottom 0.4: U3.21 19.56,20.12 20.32,19.37 23.81,19.37 27.78,15.4 29.05,15.4 30.32,14.13 30.77,14.13 32.07,12.83 32.87,12.83 33.66,12.04 33.66,10.16 32.45,8.96 J5.17 32.36,8.6 33.42,7.54 R16.2
Net_62  (via drill 0.3 pad 0.7)
  Top 0.4: v36.07,9.93 36.07,10.32 33.54,10.32 J5.18
  Bottom 0.4: J5.18 32.36,11.64 30.51,13.49 30,13.49 28.73,14.76 27.46,14.76 23.5,18.73 20,18.73 18.91,19.82 U3.20 | R17.2 36.42,10.28 v36.07,9.93
Net_63
  Bottom 0.4: U3.19 18.26,19.52 19.69,18.1 23.18,18.1 27.15,14.13 28.42,14.13 29.69,12.86 30.24,12.86 31.11,11.98 31.11,10 30.07,8.96 J5.15 29.82,7.17 R18.2
Net_64  (via drill 0.3 pad 0.7)
  Top 0.4: v39.47,14.43 39.47,14.63 38.87,15.23 37.97,15.23 36.07,13.33 31.17,13.33 29.82,11.98 J5.16
  Bottom 0.4: J5.16 29.82,11.77 28.1,13.49 26.83,13.49 22.86,17.46 19.37,17.46 17.61,19.22 U3.18 | v39.47,14.43 39.47,13.58 R19.2
Net_65
  Bottom 0.4: U3.17 16.96,18.91 19.05,16.83 22.54,16.83 26.51,12.86 27.78,12.86 28.58,12.07 28.58,10.16 27.37,8.96 J5.13 27.21,8.96 26.51,8.26 R20.2
Net_66  (via drill 0.3 pad 0.7)
  Top 0.4: v37.07,15.53 35.47,13.93 29.71,13.93 J5.14
  Bottom 0.4: J5.14 27.24,11.5 27.21,11.53 26.89,11.53 22.23,16.19 18.73,16.19 16.31,18.61 U3.16 | v37.07,15.53 35.73,15.53 R21.2
Net_67  (via drill 0.3 pad 0.7)
  Top 0.4: U5.17 28.01,32.63 28.17,32.63 30.57,30.23 30.57,30.13 v30.87,29.83
  Bottom 0.4: U4.6 10.92,20.98 11.17,21.23 11.17,21.33 11.47,21.63 13.07,21.63 13.67,22.23 13.67,22.88 14.77,23.98 15.82,23.98 15.82,24.93 16.17,25.28 19.82,25.28 20.87,26.33 24.27,26.33 24.67,25.93 25.77,25.93 26.17,25.53 26.77,25.53 30.67,21.63 32.02,21.63 32.32,21.33 33.27,21.33 34.37,22.43 34.37,28.83 33.97,29.23 31.67,29.23 31.07,29.83 v30.87,29.83
Net_68  (via drill 0.3 pad 0.7)
  Top 0.6: v16.19,34.61 16.19,38.42 J7.1
  Bottom 0.4: 16.03,33.5 16.03,34.61 v16.19,34.61
  Bottom 0.6: Q4.3 16.03,33.5
Net_69  (via drill 0.3 pad 0.7)
  Top 0.4: U5.31 25.47,23.75 v25.47,23.33
  Bottom 0.4: v25.47,23.33 25.67,23.33 25.67,22.53 26.9,21.3 R50.1
Net_70  (via drill 0.3 pad 0.7)
  Top 0.4: v18.07,30.58 18.07,31.57 18.42,31.91 20.32,31.91 20.96,31.27 22.57,31.27 U5.23
  Bottom 0.4: R39.1 15.47,30.64 18.07,30.64 v18.07,30.58
Net_72  (via drill 0.3 pad 0.7)
  Top 0.4: v28.67,17.53 28.37,17.53 27.15,16.3 U15.2
  Bottom 0.4: R51.2 24.22,23.08 24.77,22.53 24.77,21.27 28.51,17.53 v28.67,17.53
Net_73  (via drill 0.3 pad 0.7)
  Top 0.4: v29.57,17.73 29.57,17.33 28.42,16.17 U15.3
  Bottom 0.4: R50.2 28.24,18.66 28.57,18.33 28.98,18.33 v29.57,17.74 v29.57,17.73
Net_74  (via drill 0.3 pad 0.7)
  Top 0.4: v31.87,22.98 31.87,23.13 31.67,23.33 30.57,23.33 29.69,22.44 U15.13
  Bottom 0.4: C40.1 32.02,25.63 32.02,22.98 v31.87,22.98
Net_75
  Top 0.4: J8.3 30,38.42 30,33.94 U5.15
Net_76
  Top 0.4: J2.3 35.17,19.83 34.87,20.13 33.07,20.13 31.87,18.93 31.87,17.13 30.96,16.21 U15.5
Net_77
  Top 0.4: U15.6 32.23,16.58 32.47,16.83 32.47,18.63 33.37,19.53 34.57,19.53 34.92,19.18 J2.2
Net_78  (via drill 0.5 pad 1)
  Top 0.4: 37.47,18.53 J2.1
  Top 0.6: v36.57,26.23 36.17,25.83 36.17,24.03 37.12,23.08 37.12,22.98 37.47,22.63 37.47,18.53 37.47,18.43 37.77,18.13 v37.77,17.63
  Bottom 0.6: C38.1 C37.1 39.02,18.88 v37.77,17.63 | v36.57,26.23 36.57,26.13 37.07,25.63 37.07,24.93 D13.2
Net_82  (via drill 0.3 pad 0.7)
  Top 0.4: v10.92,33.33 13.61,30.64 14.61,30.64 17.52,27.73 18.22,27.73 18.91,28.42 21.91,28.42 22.88,29.39 U5.24
  Bottom 0.4: R30.2 10.57,34.08 10.92,33.73 v10.92,33.33
Net_83  (via drill 0.3 pad 0.7)
  Top 0.4: v2.77,35.88 3.25,36.35 4.29,36.35 6.05,38.12 D2.2
  Bottom 0.4: v2.77,35.88 2.77,35.83 6.82,35.83 8.02,34.63 R30.1
Net_85  (via drill 0.3 pad 0.7)
  Top 0.4: U5.32 26.93,23.99 27.47,24.53 27.47,25.33 v26.47,26.33 | v6.98,34.45 7.55,34.45 8.07,33.93 8.07,30.63 7.07,29.63 7.07,26.93 8.02,25.98 SW1.4
  Bottom 0.4: SW1.4 9.81,26.17 11.27,27.63 13.37,27.63 C16.2 | C16.2 | C16.2 15.02,25.88 19.52,25.88 20.57,26.93 24.52,26.93 24.87,26.58 26.22,26.58 v26.47,26.33 | R32.2 6.86,34.58 v6.98,34.45
Net_86  (via drill 0.3 pad 0.7)
  Top 0.4: U7.3 37.35,45.36 38.26,44.45 38.26,39.05 37.62,38.42 35.4,38.42 34.61,37.62 33.02,37.62 31.37,35.98 v31.37,35.43 | v34.77,30.63 34.77,30.33 35.67,29.43 35.67,27.43 35.47,27.23 35.47,23.48 35.02,23.03 33.72,23.03 33.07,23.68 32.42,23.68 32.17,23.93 30.27,23.93 29.77,23.43 29.29,23.43 U5.1
  Bottom 0.4: v31.37,35.43 33.12,33.67 33.12,33.34 33.97,32.49 33.97,31.73 34.77,30.93 v34.77,30.63
Net_87  (via drill 0.3 pad 0.7)
  Top 0.4: v26.37,27.43 26.37,27.33 25.72,26.67 25.72,26.19 25.21,25.69 U5.29 | v19.97,31.08 20.2,31.08 21.11,30.17 R60.1 | v18.57,32.7 22,32.7 SW3.1
  Bottom 0.4: C49.2 18.25,32.7 v18.57,32.7 | v18.57,32.7 18.73,32.54 18.73,32.32 v19.97,31.08 20.42,31.08 23.37,28.13 25.77,28.13 26.37,27.53 v26.37,27.43 26.57,27.43 26.67,27.33 27.57,27.33 27.77,27.53 28.57,27.53 29.27,26.83 31.27,26.83 31.97,27.53 C40.2 | v18.57,32.7
Net_97  (via drill 0.3 pad 0.7)
  Top 0.4: U5.7 32.67,26.83 33.12,26.83 33.77,27.48 33.77,28.33 v33.62,28.48
  Bottom 0.4: Y2.2 29.29,24 31.07,22.23 32.27,22.23 32.47,22.03 33.07,22.03 33.77,22.73 33.77,28.33 v33.62,28.48 33.62,28.63 30.74,28.63 C48.1
Net_100  (via drill 0.3 pad 0.7)
  Top 0.4: U5.20 25.21,32.1 26.98,30.33 v27.37,30.33
  Bottom 0.4: C50.1 28.29,31.35 27.37,30.43 v27.37,30.33
Net_105  (via drill 0.3 pad 0.7)
  Top 0.4: v21.12,23.78 21.79,24.45 25.03,24.45 U5.30
  Bottom 0.4: v21.12,23.78 22.12,23.78 R51.1
Net_110  (via drill 0.3 pad 0.7)
  Top 0.4: v16.57,24.53 16.57,26.53 Y1.1 | v34.67,18.13 34.67,15.97 U15.8
  Bottom 0.4: v16.57,24.53 16.57,24.48 16.92,24.13 19.52,24.13 21.12,25.73 23.97,25.73 24.37,25.33 25.47,25.33 25.87,24.93 26.17,24.93 26.87,24.23 26.87,23.23 27.37,22.73 27.67,22.73 29.97,20.43 31.52,20.43 32.22,19.73 33.63,19.73 C44.1 34.67,18.68 v34.67,18.13
Net_111  (via drill 0.3 pad 0.7)
  Top 0.4: v20.22,23.58 20.22,22.88 Y1.2 | v33.57,18.03 33.57,15.95 U15.7
  Bottom 0.4: C45.1 34.24,16.86 33.34,17.76 | 33.34,17.76 31.27,19.83 29.67,19.83 27.37,22.13 27.12,22.13 26.27,22.98 26.27,23.98 25.92,24.33 25.57,24.33 25.17,24.73 24.07,24.73 23.77,25.03 21.27,25.03 20.22,23.98 v20.22,23.58 | v33.57,18.03 33.34,17.76
Net_125  (via drill 0.3 pad 0.7)
  Top 0.4: U5.14 29.97,32.67 33.66,36.35 v33.66,36.67
  Bottom 0.4: v33.66,36.67 33.66,35.45 35.47,33.64 | 35.47,33.64 35.47,32.63 37.27,30.83 U6.2 | R61.2 35.47,36.04 35.47,33.64
Net_155  (via drill 0.3 pad 0.7)
  Top 0.4: U5.8 32.68,28.01 32.17,28.53 30.37,28.53 29.57,27.73 v29.47,27.73
  Bottom 0.4: C47.1 20.16,33.94 Y2.1 24.67,29.43 26.27,29.43 26.77,28.93 28.17,28.93 29.37,27.73 v29.47,27.73
USBVCC  (via drill 0.3 pad 0.7, 0.5 pad 1)
  Top 0.4: C17.1 34.32,26.23 32.2,26.23 31.61,26.82 U5.6 31.44,26.82 30.96,27.3 30.29,27.3 29.85,26.86 29.85,26.35 30.42,25.78 U5.4 30.35,25.69 28.67,27.37 28.67,29.43 29.27,30.03 29.27,30.63 27.97,31.93 27.57,31.93 U5.18 | 10.16,23.81 R31.1 10.16,23.65 10.16,22.23 7.94,20 v6.35,20 | 11.47,27.33 11.47,27.53 13.47,27.53 | 13.47,27.53 15.4,25.6 15.4,22.54 15.87,22.07 16.03,22.07 C13.1 18.02,20.64 v18.02,22.93 | R60.2 19.21,29.37 18.03,29.37 17.27,30.13 17.27,32.53 18.56,33.81 20.96,33.81 | U15.4 29.69,16.44 v30.37,17.13 30.37,19.23 29.47,20.13 26.47,20.13 25.88,20.72 U15.16 24.62,21.27 23.72,22.18 v23.72,22.23 | v13.27,26.63 13.47,27.53 | v9.92,27.58 9.84,27.58 9.84,28.42 | U1.10 | U1.10
  Top 0.55: 25.69,33.81 U5.18
  Top 0.6: C5.1 31.28,45.4 U2.10 | U1.10 C1.1 12.06,45.4 v12.06,46.67 | R1.1 12.22,47.79 14.45,45.56 U1.10 | U1.10 | R3.1 30,47.31 31.91,45.4 U2.10 | J4.2 36.04,63.18 34.77,61.91 34.77,53.02 | 34.77,53.02 J6.2 | 34.77,53.02 34.77,45.26 | 34.77,45.26 34.77,42.86 | 34.77,42.86 U7.2 | U2.10 34.62,45.4 34.77,45.26 | 34.77,42.86 34.77,39.05 34.13,38.42 J8.4 31.53,38.8 30.32,40.01 22.86,40.01 22.23,39.37 22.23,38.73 21.59,38.1 20,38.1 | 20,38.1 18.55,38.1 J7.2 | 20,38.1 20,34.77 20.96,33.81 22.56,33.81 23.37,34.63 24.87,34.63 | 24.87,34.63 25.69,33.81 | v12.22,42.23 11.11,41.12 5.4,41.12 4.57,40.29 SW1.1 | 10.16,23.81 10.16,23.43 | 10.16,23.43 10.16,23.92 11.47,25.23 11.47,27.33 9.84,28.96 | 9.84,28.96 9.84,33.6 10.69,34.45 11.91,34.45 14.27,36.81 v14.27,37.93 | Q3.2 13.32,21.18 v13.67,20.83 12.99,20.83 10.39,23.43 10.16,23.43 | 24.87,34.63 v24.92,34.61 24.87,34.63 | 9.84,28.42 9.84,28.96 | C15.2 38.79,26.4 U6.1 | v8.02,28.18 8.02,28.38 8.47,28.83 9.84,28.83 9.84,28.96
  Bottom 0.4: Q1.2 12.7,20.57 U4.4 | U4.5 U4.4 | U4.4 | 12.7,20.83 12.7,20.35 | v18.02,22.93 18.02,22.83 21.17,22.83 21.51,22.49 U3.24 21.51,22.23 v23.72,22.23 | J8.4 33.18,38.42 33.66,37.94 R61.1 | v30.37,17.13 30.67,16.83 31.39,16.83 31.72,17.16 C43.1 | v13.27,26.63 12.12,26.63 C14.2 | v9.92,27.58 10.37,27.58 11.07,28.28 15.02,28.28 C16.1 15.92,27.88 C29.2
  Bottom 0.6: v12.06,46.67 12.22,46.51 v12.22,42.23 | SW1.1 7.17,38.68 8.72,37.13 14.22,37.13 | 14.22,37.13 14.52,36.83 17.3,36.83 18.55,38.08 J7.2 | J8.4 31.53,36.57 34.77,33.34 34.77,31.93 35.67,31.03 35.67,29.58 37.27,27.98 U6.1 38.23,26.96 D13.1 | v14.27,37.93 14.22,37.13 | v6.35,20 | v6.35,20 7.3,20.95 R23.1 | v13.67,20.83 12.7,20.83 | 12.7,20.35 Q1.2 | v24.92,34.61 27.04,34.61 C51.1 | U11.2 6.97,30.58 | 6.97,30.58 | 6.97,30.58 U11.4 9.35,29.76 8.02,28.43 v8.02,28.18 | C30.1 6.97,30.58

## Text on the board
tPlace: J1 | J3 | J4 | U1 | U2 | R2 | C2 | R4 | C6 | C8 | J6 | C4 | S1 | R1 | S2 | R3 | C1 | C5 | U7 | J7 | J8 | SW1 | D2 | U5 | SW3 | U6 | R60 | Y1 | C17 | C15 | R31 | R36 | U15 | Q3 | C13 | J2 | R22 | R12 | R34 | R5 | R6 | R8 | R10 | SW2 | J9 | J5
bPlace: C7 | C3 | C12 | C10 | C11 | C9 | R61 | C47 | R32 | R30 | R40 | Q4 | C49 | C51 | U11 | C50 | C28 | R39 | C48 | R27 | C29 | C14 | R26 | Y2 | C40 | D13 | C30 | C16 | U4 | R51 | U3 | C38 | R23 | R24 | R25 | R50 | C37 | C44 | C43 | C45 | Q1 | R21 | Q2 | R33 | R29 | R17 | R19 | R28 | R7 | R9 | R20 | R18 | R16 | R14 | R15 | R11 | R13